# Altium PCB ArduinoProMini_PCB.PcbDoc
Units mm, origin at the board's own origin, x right, y up, seen from the top; angles counter-clockwise.
Board outline 60 x 30 mm, 2 copper layers (Top Layer, Bottom Layer), stack 1.672 mm thick; 26 components, 32 nets, 123 pads, 6 vias.
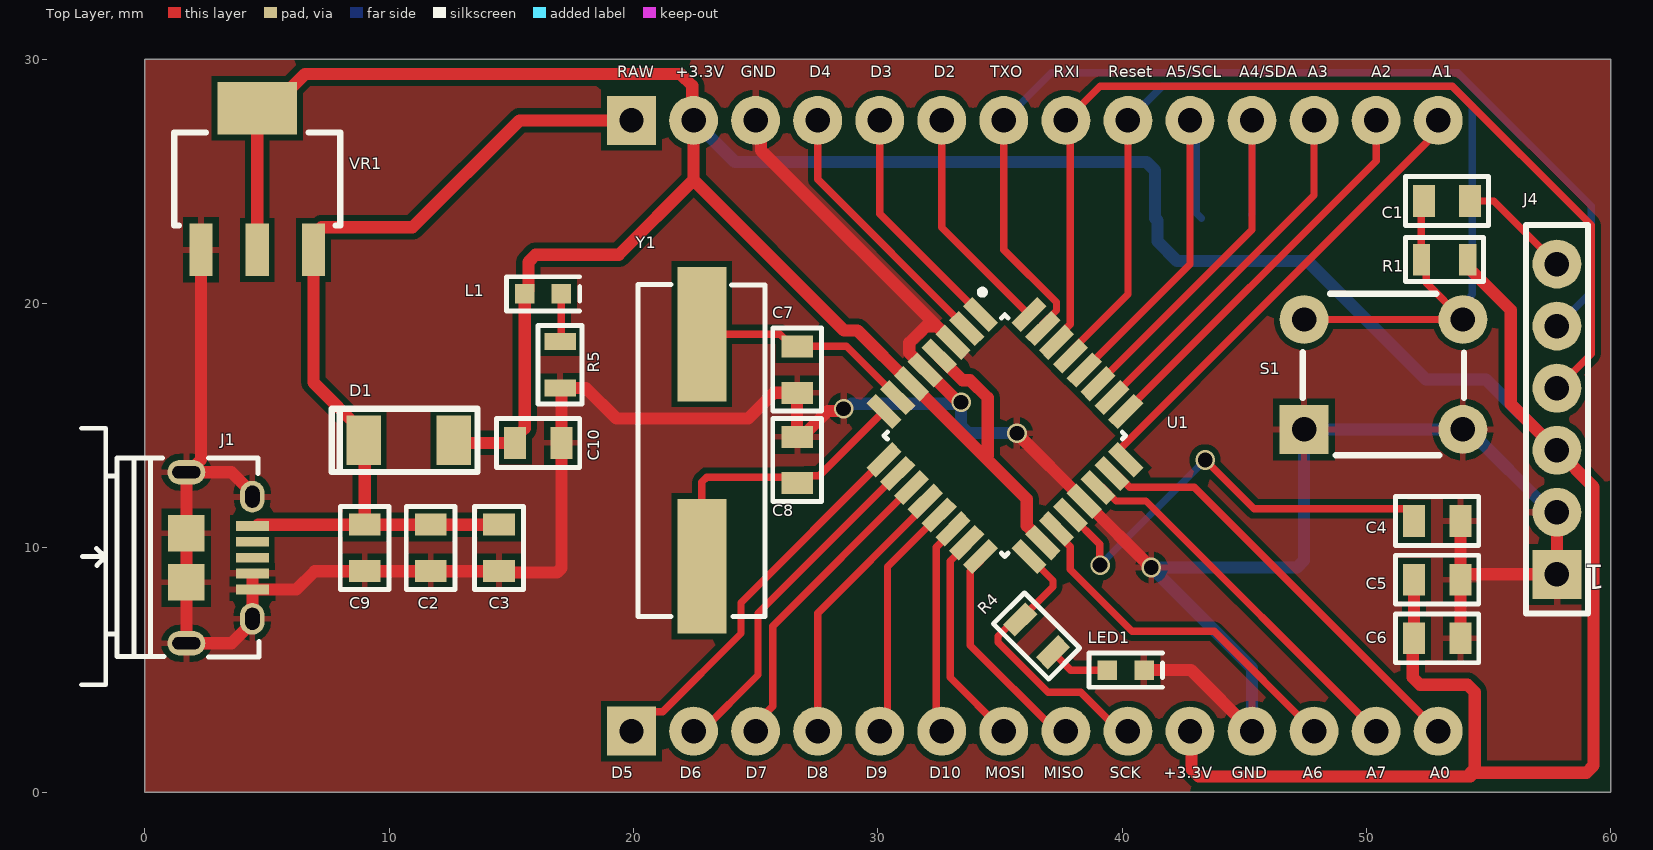
[diagram p0: Top Layer view]
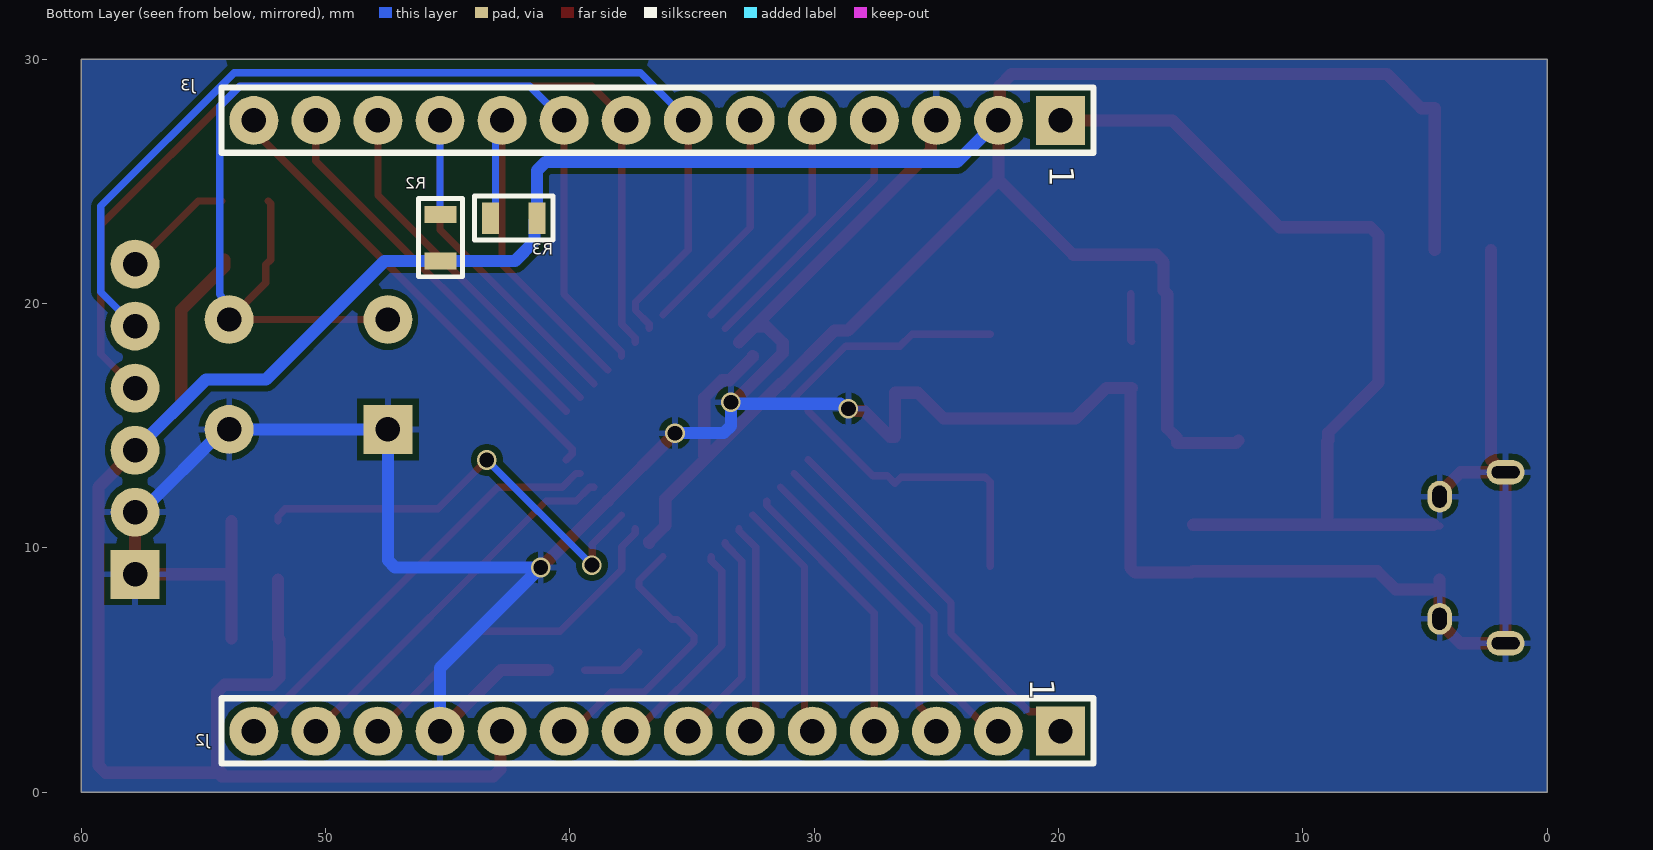
[diagram p1: Bottom Layer view, seen from below]
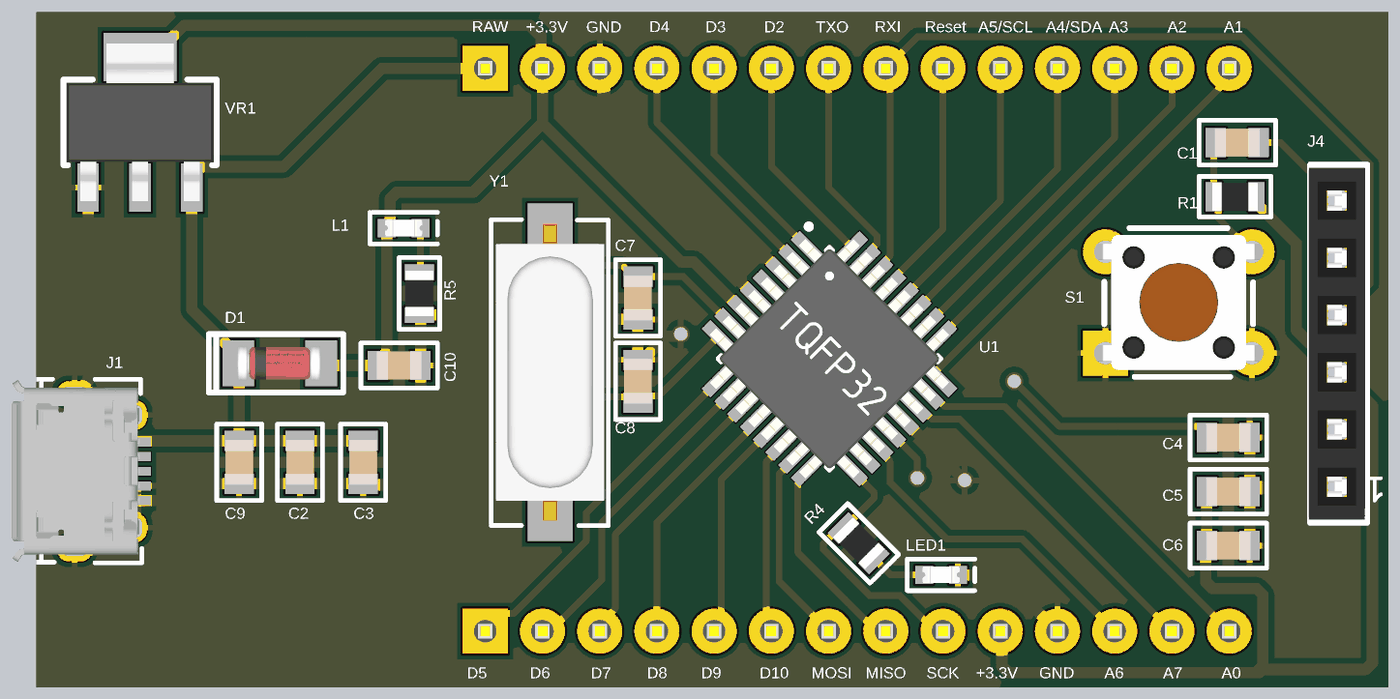
[diagram p2: 3D render of the assembled board from above, using the file's embedded part models]
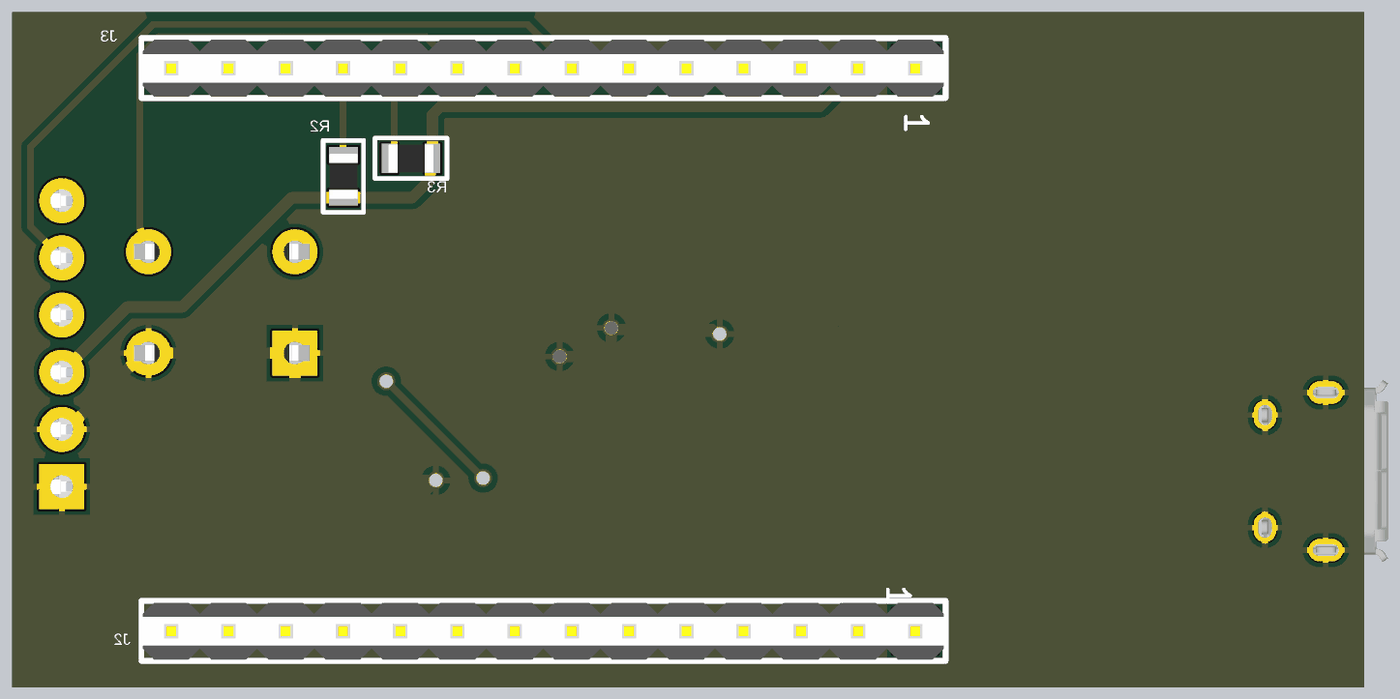
[diagram p3: 3D render of the assembled board from below, using the file's embedded part models]

## Layer stack, top to bottom
Top Solder: solder mask 0.0102, Solder Resist, Dk 3.5
Top Layer: signal copper 0.036
Dielectric 1: dielectric 1.6, FR-4, Dk 4.8
Bottom Layer: signal copper 0.036
Bottom Solder: solder mask 0.0102, Solder Resist, Dk 3.5

## Board outline
0,0 0,30 60,30 60,0

## Design rules (kind name [scope] priority, off if disabled: settings)
Clearance Clearance_Polygon [All] p1: gap=0.25 ignorepadtopadclearanceinfootprint=FALSE
Clearance [InPolygon] p2: gap=0.5 ignorepadtopadclearanceinfootprint=FALSE
HoleSize [All] p1: absolutevalues=TRUE maxlimit=5 minlimit=0.5 maxpercent=80.000 minpercent=20.000
HoleToHoleClearance [All] p1: gap=0.25 allowstackedmicrovias=TRUE
MinimumSolderMaskSliver [All] p1: minsoldermaskwidth=0.1
PolygonConnect [All] p1: connectstyle=Relief reliefconductorwidth=0.254 reliefentries=4 polygonreliefangle="90 Angle" airgapwidth=0.254
RoutingVias [All] p1: holewidth=0.6 width=0.8 viastyle="Through Hole" minholewidth=0.5 minwidth=0.7 maxholewidth=1 maxwidth=2
SilkToSilkClearance [All] p1: silktosilkclearance=0.1
SilkToSolderMaskClearance [IsPad] p1: minsilkscreentomaskgap=0.1 clearancetoexposedcopper=TRUE
SolderMaskExpansion [All] p1: expansion=0.102 istentingtop=FALSE
SupplyNets "Schematic Supply Nets_1" [InNet('GND')] p1: voltage=0.000
SupplyNets "Schematic Supply Nets" [InNet('+3.3V')] p2: voltage=0.000
Width [All] p1: maxlimit=1 minlimit=0.25 preferedwidth=0.3
25 further rules are at their usual default settings.

## Components (designator, comment, footprint, x,y, rotation, side; value= is the part's Value field where it differs from the comment)
C1 "100 nF 50V 0805" "C 0805" 53.3,24.2 r180 top value=100nF
C2 "100nF" "C 0805" 11.7,10 r90 top
C3 "100nF" "C 0805" 14.5,10 r90 top
C4 "100 nF 50V 0805" "C 0805" 52.9,11.1 r0 top value=100nF
C5 "100 nF 50V 0805" "C 0805" 52.9,8.7 r180 top value=100nF
C6 "100 nF 50V 0805" "C 0805" 52.9,6.3 r180 top value=100nF
C7 "18pF" "C 0805" 26.7,17.3 r90 top
C8 "18pF" "C 0805" 26.7,13.6 r270 top
C9 "10uF 16V" "C 0805" 9,10 r90 top value=10uF
C10 "10uF" "C 0805" 16.1,14.3 r180 top
D1 "1N4148" "DIode 1N4148" 10.8,14.4 r180 top
J1 "" Micro-USB-Type-B-FP 4.4,9.6 r270 top
J2 "Header 1*14 Male 2.54" "Header Male 1x14 2.54" 19.92,2.5 r270 bottom
J3 "Header 1*14 Male 2.54" "Header Male 1x14 2.54" 19.92,27.5 r270 bottom
J4 "Header 1*6 Female" "Header Female 1x6-254" 57.8,15.27 r180 top
L1 "LED Blue 0603" "LED 0603" 16.3,20.4 r0 top
LED1 "LED White 0603" "LED 0603" 40.15,5 r0 top
R1 "10K 16V" "R 0805" 53.2,21.8 r0 top value=10kR
R2 "10K 16V" "R 0805" 45.3,22.7 r90 bottom value=10kR
R3 "10K 16V" "R 0805" 42.3,23.5 r0 bottom value=10kR
R4 "330R 150V" "R 0805" 36.5,6.4 r135 top
R5 "330R 150V" "R 0805" 17,17.5 r90 top
S1 "1825910-6" SW-1825910-6 50.7,17.1 r90 top
U1 "ATMEGA328P-AUR" TQFP-32 35.2,14.6 r315 top
VR1 "LM1117-3.3" LM1117-SOT223 4.6,25.1 r90 top
Y1 "CSM 8Mhz" "Crystal CSM-7X" 22.8,14 r90 top

## Footprints (in the part's own frame and the unit in brackets; to place one, negate y for a bottom-side part, rotate by r counter-clockwise, add the part's x,y. Pads: shape width x height; smd on the part's side, far side on the other; paste and mask are expansions set on the pad)
"C 0805" [mm]
  rect 0.9x1.3 smd: 1(-0.95,0) 2(0.95,0)
  silkscreen extent -1.7,-1 1.7,1, body extent -1,-0.63 1,0.63, height 0.61
"Crystal CSM-7X" [mm]
  rect 5.5x2 smd: 1(-4.75,0) 2(4.75,0)
  silkscreen extent -6.81,-2.59 6.78,2.62, body extent -6.6,-2.4 6.6,2.4, height 4.31
"DIode 1N4148" [mm]
  rect 1.4x2.03 smd: A(-1.84,0) K(1.84,0)
  silkscreen extent -2.82,-1.3 3.15,1.3, body extent -1.81,-0.79 1.89,0.8, height 1.6
"Header Female 1x6-254" [mm]
  rect 2x2 hole 1: 1(0,6.35)
  round 2 hole 1: 2(0,3.81) 3(0,1.27) 4(0,-1.27) 5(0,-3.81) 6(0,-6.35)
  silkscreen extent -1.27,-7.95 1.27,7.95, body extent -1.17,-7.82 1.33,7.82, height 8.51
"Header Male 1x14 2.54" [mm]
  rect 2x2 hole 1: 1(0,0)
  round 2 hole 1: 2(0,-2.54) 3(0,-5.08) 4(0,-7.62) 5(0,-10.16) 6(0,-12.7) 7(0,-15.24) 8(0,-17.78) 9(0,-20.32) 10(0,-22.86) 11(0,-25.4) 12(0,-27.94) 13(0,-30.48) 14(0,-33.02)
  silkscreen extent -1.35,-34.34 1.32,1.35, body extent -1.27,-34.29 1.27,1.27, height 5.4
"LED 0603" [mm]
  rect 0.8x0.8 smd: 1(-0.75,0) 2(0.75,0)
  silkscreen extent -1.5,-0.7 1.5,0.7, body extent -0.82,-0.36 0.82,0.37, height 0.68
LM1117-SOT223 [mm]
  rect 2.15x0.95 smd: 1(-2.9,2.3) 2(-2.9,0) 3(-2.9,-2.3)
  rect 2.15x3.25 smd: 4(2.9,0)
  silkscreen extent -1.9,-3.4 1.9,3.4, body extent -3.5,-3.25 3.5,3.25, height 1.61
Micro-USB-Type-B-FP [mm]
  rect 0.4x1.35 smd mask+0.06: 1(-1.3,0) 2(-0.65,0) 3(0,0) 4(0.65,0) 5(1.3,0)
  oval 1.3x1 hole 0.6 slot 0.9 at 0 deg mask+0.06: 6(-2.5,0) 7(2.5,0)
  oval 1x1.55 hole 0.5 slot 1.15 at 90 deg mask+0.06: 8(-3.5,-2.7) 9(3.5,-2.7)
  rect 1.5x1.5 smd mask+0.06: 10(-1,-2.7) 11(1,-2.7)
  silkscreen extent -5.3,-7 5.2,0.28, body extent -4.04,-5.49 4.01,0.2, height 2.77
"R 0805" [mm]
  rect 0.7x1.3 smd: 1(-0.95,0) 2(0.95,0)
  silkscreen extent -1.6,-0.9 1.6,0.9, body extent -1,-0.63 1,0.63, height 0.61
SW-1825910-6 [mm]
  rect 2x2 hole 1: 1(-2.25,3.25)
  round 2 hole 1: 2(-2.25,-3.25) 3(2.25,-3.25) 4(2.25,3.25)
  silkscreen extent -3.3,-3.3 3.3,3.3, body extent -3,-3.9 3,3.9, height 5
TQFP-32 [mm]
  rect 1.5x0.55 smd mask+0.06: 1(-4.2,2.8) 2(-4.2,2) 3(-4.2,1.2) 4(-4.2,0.4) 5(-4.2,-0.4) 6(-4.2,-1.2) 7(-4.2,-2) 8(-4.2,-2.8) 17(4.2,-2.8) 18(4.2,-2) 19(4.2,-1.2) 20(4.2,-0.4) 21(4.2,0.4) 22(4.2,1.2) 23(4.2,2) 24(4.2,2.8)
  rect 0.55x1.5 smd mask+0.06: 9(-2.8,-4.2) 10(-2,-4.2) 11(-1.2,-4.2) 12(-0.4,-4.2) 13(0.4,-4.2) 14(1.2,-4.2) 15(2,-4.2) 16(2.8,-4.2) 25(2.8,4.2) 26(2,4.2) 27(1.2,4.2) 28(0.4,4.2) 29(-0.4,4.2) 30(-1.2,4.2) 31(-2,4.2) 32(-2.8,4.2)
  silkscreen extent -4.9,-3.5 3.5,3.6, body extent -4.51,-4.51 4.51,4.51, height 1.1

## Part data
C1 C2 C3 C4 C5 C6: library part C0805C104Z5VACTU, "Multilayer Ceramic Capacitor, 0.1 uF, 50 V, -20%, +80%, Y5V, 0805 [2012 Metric]", Case Code (Imperial)=0805, Case Code (Metric)=2012, Dielectric=Y5V, Dielectric Material=Ceramic, Manufacturer=KEMET, Max Operating Temperature=85°C, Min Operating Temperature=-30°C, Package Quantity=1, Supplier Part Number=399-C0805C104Z5VAC7800CT-ND, Tolerance=80%, Voltage=50V, Case/Package=0805, Category="Ceramic Capacitors", ComponentLink1Description=https://datasheet.ciiva.com/7842/1470417-7842543.pdf?src-supplier=Element14, ComponentLink1URL=https://datasheet.ciiva.com/7842/1470417-7842543.pdf?src-supplier=Element14, ComponentLink2Description=https://datasheet.ciiva.com/14608/70095383-14608251.pdf?src-supplier=Allied+Electronics, ComponentLink2URL=https://datasheet.ciiva.com/14608/70095383-14608251.pdf?src-supplier=Allied+Electronics, ComponentLink3Description=https://datasheet.ciiva.com/14597/70095383-14597846.pdf?src-supplier=Allied+Electronics, ComponentLink3URL=https://datasheet.ciiva.com/14597/70095383-14597846.pdf?src-supplier=Allied+Electronics, ComponentLink4Description=https://datasheet.ciiva.com/26847/getdatasheetpartid-321176-26847799.pdf?src-supplier=Verical, ComponentLink4URL=https://datasheet.ciiva.com/26847/getdatasheetpartid-321176-26847799.pdf?src-supplier=Verical, Construction=Flat, Depth=1.25mm, Dissipation Factor=5%, Height=0.9mm, Lead Free=5697LeadFree, Lead Pitch=0.75mm, Length=2mm, Manufacturer Part Number=C0805C104Z5VACTU, Material=4241ConductorMaterial, Mounting Technology="Surface Mount,PCB", Packaging="Tape and Reel", Pins=2NUMBER, Pricing="1=0.1, 10=0.043, 50=0.0248, 100=0.0193, 500=0.0145, 1000=0.01139 (USD)", Radiation Hardening=No, Reach SVHC Compliant=No, RoHS=Yes, RoHS Compliant=Yes, Series=C0805C, Stock=411669, Supplier=Digikey, Termination=SMD/SMT, Thickness=0.039inch, Voltage Rating=50V, Voltage Rating (DC)=50V, Width=0.049inch
C7 C8: library part CC0805JRNPO9BN180, "Multilayer Ceramic Capacitor, 18 pF, 50 V, ± 5%, C0G (NP0), 0805 [2012 Metric]", Manufacturer=Yageo, Supplier Part Number=7642911, Category="Ceramic Capacitors", ComponentLink1Description=https://datasheet.ciiva.com/26862/getdatasheetpartid-403658-26862933.pdf?src-supplier=Verical, ComponentLink1URL=https://datasheet.ciiva.com/26862/getdatasheetpartid-403658-26862933.pdf?src-supplier=Verical, ComponentLink2Description=https://datasheet.ciiva.com/144/mlccorderingcode-144754.pdf?src-supplier=Digikey, ComponentLink2URL=https://datasheet.ciiva.com/144/mlccorderingcode-144754.pdf?src-supplier=Digikey, ComponentLink3Description=https://datasheet.ciiva.com/144/mlccorderingcode-144755.pdf?src-supplier=Digikey, ComponentLink3URL=https://datasheet.ciiva.com/144/mlccorderingcode-144755.pdf?src-supplier=Digikey, ComponentLink4Description=https://datasheet.ciiva.com/144/mlccorderingcode-144756.pdf?src-supplier=Digikey, ComponentLink4URL=https://datasheet.ciiva.com/144/mlccorderingcode-144756.pdf?src-supplier=Digikey, ComponentLink5Description=https://datasheet.ciiva.com/11586/upy-gp-np0-16v-to-50v-8-11586203.pdf?src-supplier=Avnet, ComponentLink5URL=https://datasheet.ciiva.com/11586/upy-gp-np0-16v-to-50v-8-11586203.pdf?src-supplier=Avnet, Halogen Free=5694HalogenFree, Lead Free=5697LeadFree, Manufacturer Part Number=CC0805JRNPO9BN180, Pricing="4000=0.0082, 16000=0.0078, 60000=0.0075, 100000=0.0073, 200000=0.0069 (USD)", RoHS=Yes, Stock=232000, Supplier="Future Electronics"
C9 C10: library part C0805C106K4PACTU, "Multilayer Ceramic Capacitor, 10 uF, 16 V, ± 10%, X5R, 0805 [2012 Metric]", Case Code (Imperial)=0805, Case Code (Metric)=2012, Dielectric=X5R, Dielectric Material=Ceramic, Manufacturer=KEMET, Max Operating Temperature=85°C, Min Operating Temperature=-55°C, Package Quantity=1, Supplier Part Number=399-C0805C106K4PAC7800CT-ND, Tolerance=10%, Voltage=16V, Case/Package=0805, Category="Ceramic Capacitors", ComponentLink1Description=https://datasheet.ciiva.com/7842/1732713-7842196.pdf?src-supplier=Element14, ComponentLink1URL=https://datasheet.ciiva.com/7842/1732713-7842196.pdf?src-supplier=Element14, ComponentLink2Description=https://datasheet.ciiva.com/28682/1831760-28682305.pdf?src-supplier=Element14, ComponentLink2URL=https://datasheet.ciiva.com/28682/1831760-28682305.pdf?src-supplier=Element14, ComponentLink3Description=https://datasheet.ciiva.com/11787/0900766b8116eb59-11787314.pdf?src-supplier=Rs, ComponentLink3URL=https://datasheet.ciiva.com/11787/0900766b8116eb59-11787314.pdf?src-supplier=Rs, ComponentLink4Description=https://datasheet.ciiva.com/7842/1732713-7842197.pdf?src-supplier=Element14, ComponentLink4URL=https://datasheet.ciiva.com/7842/1732713-7842197.pdf?src-supplier=Element14, Construction=Flat, Depth=1.25mm, Dissipation Factor=5%, Height=1.25mm, Lead Free=5697LeadFree, Length=2mm, Manufacturer Part Number=C0805C106K4PACTU, Material=4241ConductorMaterial, Mounting Technology="Surface Mount", Packaging="Tape and Reel", Pins=2, Pricing="1=0.17, 10=0.109, 50=0.069, 100=0.0553, 500=0.03992, 1000=0.03531 (USD)", Radiation Hardening=No, Reach SVHC Compliant=No, RoHS=Yes, RoHS Compliant=Yes, Series=C, Stock=211297, Supplier=Digikey, Termination=SMD/SMT, Thickness=0.055inch, Voltage Rating=16V, Voltage Rating (DC)=16V, Width=0.049inch
D1: library part 1N4148UR-1, "Rectifier Diode Switching 75V 0.2A 5ns 2-Pin DO-213AA Bag", Forward Current=200mA, Manufacturer=Microsemi, Max Repetitive Reverse Voltage (Vrrm)=75V, Supplier Part Number=34AJ8178, Category=Uncategorized, ComponentLink1Description=https://datasheet.ciiva.com/3304/lds-0281-1-3304223.pdf?src-supplier=Avnet, ComponentLink1URL=https://datasheet.ciiva.com/3304/lds-0281-1-3304223.pdf?src-supplier=Avnet, Lead Free="Lead Free", Manufacturer Part Number=1N4148UR-1, Reverse Recovery Time-Max=5ns, RoHS=No, Supplier=Newark
J1: library part Micro-USB-Type-B-SCH, "CONN USB MICRO B RECPT SMT R/A", Color=Black, Current Rating=1.8A, Flammability Rating="UL94 V-0", Insulation Resistance=1GR, Manufacturer="Amphenol ICC / FCI", Manufacturer Part Number=10118194-0001LF, Max Operating Temperature=85°C, Max Voltage Rating (AC)=100V, Min Operating Temperature=-55°C, Package Quantity=9600, Supplier Part Number=1370829, Category=LDO, Connector Type=USB,Receptacle, Contact Material="Copper Alloy", Contact Plating=Gold, Depth=5mm, Features=Shielded, Gender=Receptacle, Housing Material=Polymer, Length=8.05mm, Mounting Technology="Surface Mount,Horizontal", Number of Contacts=5, Number of Ports=1, Orientation="Right Angle", Packaging="Tape and Reel", Pins=5, Pricing="1200=0.225, 2400=0.219 (EUR)", RoHS=No, Series=-, Stock=4420, Supplier=Rs, Termination=Solder
J2 J3: library part PH1-14-UA, "Conn Unshrouded Header HDR 14 POS 2.54mm Solder ST Thru-Hole Bag", Flammability Rating="UL94 V-0", Insulation Color=Black, Manufacturer="Adam Equipment", Max Operating Temperature=105°C, Min Operating Temperature=-40°C, Supplier Part Number=9109416, Voltage Rating (AC)=250V, Category=Connectors, ComponentLink1Description=https://datasheet.ciiva.com/16480/catpg250-254-16480235.pdf?src-supplier=Future+Electronics, ComponentLink1URL=https://datasheet.ciiva.com/16480/catpg250-254-16480235.pdf?src-supplier=Future+Electronics, Connector Type=Header, Contact Finish - Mating=GOLD, Contact Material=Brass, Contact Shape=Square, Contact Type="Male Pin", Fastening Type=Pull, Insulation Material=PBT, Lead Free="Lead Free", Manufacturer Part Number=PH1-14-UA, Mounting Technology="Through Hole", Number of Positions=14, Number of Rows=1, Packaging=Bulk, Pricing="1000=0.0993, 3000=0.0952, 5000=0.0934, 15000=0.0895, 25000=0.0862 (USD)", RoHS=Yes, Series=PH1, Stock=12000, Supplier="Future Electronics", Termination=Solder
J4: library part M20-7820646, "2.54mm (0.1\") Pitch SIL Vertical PC Tail Socket Assembly, tin, 6 contacts", Case/Package=SIL, Flammability Rating="UL94 V-0", Insulation Color=Black, Manufacturer=Harwin, Max Operating Temperature=105°C, Min Operating Temperature=-40°C, Package Quantity=38, Supplier Part Number=1613515, Voltage Rating=1kV, Category="Headers and Wire Housings", ComponentLink1Description=https://cdn.harwin.com/pdfs/Harwin_PC_Connectors_M20.pdf?src-supplier=Rs, ComponentLink1URL=https://cdn.harwin.com/pdfs/Harwin_PC_Connectors_M20.pdf?src-supplier=Rs, ComponentLink2Description=http://www.harwin.com/include/downloads/pdfs/2010PAGE120.PDF?src-supplier=Avnet, ComponentLink2URL=http://www.harwin.com/include/downloads/pdfs/2010PAGE120.PDF?src-supplier=Avnet, ComponentLink3Description=https://cdn.harwin.com/pdfs/M20-782.pdf?src-supplier=Digikey, ComponentLink3URL=https://cdn.harwin.com/pdfs/M20-782.pdf?src-supplier=Digikey, ComponentLink4Description=https://cdn.harwin.com/pdfs/Harwin_PC_Connectors_M20.pdf?src-supplier=Mouser, ComponentLink4URL=https://cdn.harwin.com/pdfs/Harwin_PC_Connectors_M20.pdf?src-supplier=Mouser, ComponentLink5Description=https://cdn.harwin.com/pdfs/Harwin_PC_Connectors_M20.pdf?src-supplier=TTI, ComponentLink5URL=https://cdn.harwin.com/pdfs/Harwin_PC_Connectors_M20.pdf?src-supplier=TTI, Connector Type=Receptacle, Contact Finish - Mating=TIN, Contact Gender=Female, Contact Material=Bronze, Contact Plating=Tin, Contact Shape=Square, Contact Type="Female Socket", Fastening Type=Pull, Insulation Material=Nylon, Manufacturer Part Number=M20-7820646, Mated Stacking Heights=12.63mm, Mounting Technology="Through Hole", Number of Contacts=6, Number of Positions=6, Number of Rows=1, Packaging=Rail/Tube, Pitch=2.54mm, Pricing="36=0.938, 180=0.875, 360=0.781, 720=0.704 (EUR)", Radiation Hardening=No, RoHS=Yes, RoHS Compliant=Yes, Series=M20, Stock=396, Supplier=Rs, Termination=Solder
L1: library part LTST-C194TBKT, "LED BLUE CLEAR 0603 SMD", Manufacturer="Vishay Lite-On", Supplier Part Number=1278417, Category=LEDs, ComponentLink1Description=https://datasheet.ciiva.com/2115/ltst-c194tbkt-2115056.pdf?src-supplier=Digikey, ComponentLink1URL=https://datasheet.ciiva.com/2115/ltst-c194tbkt-2115056.pdf?src-supplier=Digikey, ComponentLink2Description=https://datasheet.ciiva.com/4689/lite-on-ltst-c194tbkt-187209-4689177.pdf?src-supplier=Mouser, ComponentLink2URL=https://datasheet.ciiva.com/4689/lite-on-ltst-c194tbkt-187209-4689177.pdf?src-supplier=Mouser, ComponentLink3Description=https://datasheet.ciiva.com/2115/s-110-ltst-c194tbkt-2115057.pdf?src-supplier=Digikey, ComponentLink3URL=https://datasheet.ciiva.com/2115/s-110-ltst-c194tbkt-2115057.pdf?src-supplier=Digikey, Manufacturer Part Number=LTST-C194TBKT, Pricing="50=0.208, 750=0.092, 1500=0.069, 3000=0.066, 6000=0.058 (EUR)", RoHS=Yes, Stock=8750, Supplier=Rs
LED1: library part IN-S63AT5UW, "SMD LED - Mono Color Top View, 0603 0.40mm LED PCB Type, White, High Brightness, Clear Lens, Angle 120", Case Code (Imperial)=0603, Case Code (Metric)=1608, Color=White, Forward Current=5mA, Forward Voltage=3V, Lens Color=Clear, Manufacturer=Inolux, Max Operating Temperature=85°C, Min Operating Temperature=-40°C, Power Dissipation=75mW, Reverse Voltage=5V, Supplier Part Number=743-IN-S63AT5UW, Case/Package=0603, Category=LEDs, ComponentLink1Description=http://www.inolux-corp.com/datasheet/SMDLED/Mono%20Color%20Top%20View/IN-S63AT%20Series_V1.1.pdf?src-supplier=Digikey, ComponentLink1URL=http://www.inolux-corp.com/datasheet/SMDLED/Mono%20Color%20Top%20View/IN-S63AT%20Series_V1.1.pdf?src-supplier=Digikey, Height=0.4mm, Length=1.6mm, Lens Size=0.8mm, Lens Style=Flat, Lens Transparency=Clear, Luminous Intensity=900mcd, Manufacturer Part Number=IN-S63AT5UW, Mounting Technology="Surface Mount", Packaging="Tape and Reel", Pricing="1=0.33, 10=0.177, 50=0.177, 100=0.076, 1000=0.059, 10000=0.044 (USD)", RoHS=Yes, Stock=170396, Supplier=Mouser, Test Current=5mA, Viewing Angle=120°, Width=0.8mm
R1 R2 R3: library part RC0805FR-0710KL, "SMD Chip Resistor, 10 kOhm, ± 1%, 125 mW, 0805 [2012 Metric], Thick Film, General Purpose", Case Code (Imperial)=0805, Case Code (Metric)=2012, Manufacturer=Yageo, Max Operating Temperature=155°C, Max Power Dissipation=125mW, Min Operating Temperature=-55°C, Package Quantity=1, Resistance Tolerance=1%, Resistor Type="Thick Film", Supplier Part Number=3310877, Temperature Coefficient=100ppm/°C, Voltage Rating=150V, Case/Package=0805, Category="Chip SMD Resistors", ComponentLink1Description=https://datasheet.ciiva.com/2456/pyu-r-int-thick-7-2456973.pdf?src-supplier=Digikey, ComponentLink1URL=https://datasheet.ciiva.com/2456/pyu-r-int-thick-7-2456973.pdf?src-supplier=Digikey, ComponentLink2Description=https://datasheet.ciiva.com/2456/pyu-r-int-thick-7-2456974.pdf?src-supplier=Digikey, ComponentLink2URL=https://datasheet.ciiva.com/2456/pyu-r-int-thick-7-2456974.pdf?src-supplier=Digikey, ComponentLink3Description=https://datasheet.ciiva.com/12669/rc0805-12669688.pdf?src-supplier=Mouser, ComponentLink3URL=https://datasheet.ciiva.com/12669/rc0805-12669688.pdf?src-supplier=Mouser, ComponentLink4Description=https://datasheet.ciiva.com/16747/rc0805-16747087.pdf?src-supplier=Future+Electronics, ComponentLink4URL=https://datasheet.ciiva.com/16747/rc0805-16747087.pdf?src-supplier=Future+Electronics, Construction=Rectangular, Depth=1.25mm, Features="Moisture Resistant", Height=0.024inch, Lead Free="Lead Free", Length=0.079inch, Manufacturer Part Number=RC0805FR-0710KL, Military Standard=Not, Number of Terminations=2, Packaging="Tape and Reel", Power Rating=125mW, Pricing="5000=0.004, 25000=0.0038, 150000=0.0035, 500000=0.0034, 1500000=0.0031 (USD)", Reach SVHC Compliant=Unknown, RoHS=Yes, RoHS Compliant=Yes, Series=RC, Stock=1020000, Supplier="Future Electronics", Technology="THICK FILM", Termination=SMD/SMT, Tolerance=1%, Voltage Rating (AC)=150V, Width=0.049inch
R4 R5: library part RC0805JR-07330RL, "SMD Chip Resistor, 330 Ohm, ± 5%, 125 mW, 0805 [2012 Metric], Thick Film, General Purpose", Manufacturer=Yageo, Supplier Part Number=7136500, Voltage Rating (AC)=150V, Category="Chip SMD Resistors", ComponentLink1Description=https://datasheet.ciiva.com/12555/rc0805-257173-12555078.pdf?src-supplier=Mouser, ComponentLink1URL=https://datasheet.ciiva.com/12555/rc0805-257173-12555078.pdf?src-supplier=Mouser, ComponentLink2Description=https://datasheet.ciiva.com/46395/444164-46395119.pdf?src-supplier=Element14, ComponentLink2URL=https://datasheet.ciiva.com/46395/444164-46395119.pdf?src-supplier=Element14, ComponentLink3Description=https://datasheet.ciiva.com/7941/442941-7941941.pdf?src-supplier=Element14, ComponentLink3URL=https://datasheet.ciiva.com/7941/442941-7941941.pdf?src-supplier=Element14, ComponentLink4Description=https://datasheet.ciiva.com/7941/442941-7941942.pdf?src-supplier=Element14, ComponentLink4URL=https://datasheet.ciiva.com/7941/442941-7941942.pdf?src-supplier=Element14, ComponentLink5Description=https://datasheet.ciiva.com/17008/rc0805-17008395.pdf?src-supplier=Future+Electronics, ComponentLink5URL=https://datasheet.ciiva.com/17008/rc0805-17008395.pdf?src-supplier=Future+Electronics, Manufacturer Part Number=RC0805JR-07330RL, Pricing="5000=0.0037, 25000=0.0034, 125000=0.0032, 250000=0.0031, 750000=0.0029 (USD)", RoHS=Yes, Stock=415000, Supplier="Future Electronics"
S1: "Alcoswitch, Switch, Pushbutton, Tactile, SPST, 50mA, Thru Hole, 6mm", Color=46Colour, Contact Current Rating=50mA, Insulation Resistance=100MR, Manufacturer="TE Connectivity Alcoswitch", Max Operating Temperature=85°C, Max Voltage Rating (DC)=24V, Min Operating Temperature=-35°C, Operating Force=160gf, Supplier Part Number=9026957, Actuator Length=0.055inch, Actuator Material=PBT, Actuator Type=Standard, Category="Pushbutton Switches", ComponentLink1Description=https://datasheet.ciiva.com/30199/1825910-6rqpn1825910-6-30199520.pdf?src-supplier=Onlinecomponents.com, ComponentLink1URL=https://datasheet.ciiva.com/30199/1825910-6rqpn1825910-6-30199520.pdf?src-supplier=Onlinecomponents.com, ComponentLink2Description=https://datasheet.ciiva.com/15184/getdatasheetpartid-395915-15184509.pdf?src-supplier=Verical, ComponentLink2URL=https://datasheet.ciiva.com/15184/getdatasheetpartid-395915-15184509.pdf?src-supplier=Verical, Contact Material="Copper Alloy", Contact Plating=Silver, Current Rating=50mA, ELV=Compliant, Illumination Type=Non-Illuminated,Illuminated, Lead Free="Lead Free", Length=5.99mm, Manufacturer Part Number=1825910-6, Material=4261ConductorMaterial, Max Current Rating=50mA, Mechanical Life=100000Cycles, Mounting Technology="Through Hole", Number of Positions=2NUMBER, Packaging="Loose Piece", Pricing="1=0.0732, 750=0.0703, 2500=0.0673, 7500=0.0647, 25000=0.0596 (USD)", Reach SVHC Compliant=Unknown, RoHS=Yes, RoHS Compliant=Yes, Series=FSMJ, Stock=109532, Supplier="Future Electronics", Switch Function=Off-Mom, Switch Travel=0.25mm, Termination="PC Pins", Throw Configuration=SPST, Type=Switch, Width=6mm
U1: "1.8V~5.5V AVR 2MHz 23 TQFP-32 Microcontroller Units (MCUs/MPUs/SOCs) ROHS", Case/Package=TQFP, Clock Frequency=20MHz, Manufacturer=Microchip, Max Operating Temperature=85°C, Max Supply Voltage=5.5V, Min Operating Temperature=-40°C, Min Supply Voltage=1.8V, Supplier Part Number=1773264P, Category=Microcontrollers, ComponentLink1Description=http://www.farnell.com/datasheets/2047852.pdf?src-supplier=Farnell, ComponentLink1URL=http://www.farnell.com/datasheets/2047852.pdf?src-supplier=Farnell, ComponentLink2Description=http://components.arrow.com/part/dataview/48719204S8832641N3744?src-supplier=Arrow+Electronics, ComponentLink2URL=http://components.arrow.com/part/dataview/48719204S8832641N3744?src-supplier=Arrow+Electronics, ComponentLink3Description=http://www.produktinfo.conrad.com/datenblaetter/1200000-1299999/001267077-da-01-en-IC_MCU_8BIT_3_ATMEGA328P_AUR_TQFP_32_ATM.pdf?src-supplier=Conrad, ComponentLink3URL=http://www.produktinfo.conrad.com/datenblaetter/1200000-1299999/001267077-da-01-en-IC_MCU_8BIT_3_ATMEGA328P_AUR_TQFP_32_ATM.pdf?src-supplier=Conrad, ComponentLink4Description=https://datasheet.octopart.com/ATMEGA328P-AUR-Microchip-datasheet-14421303.pdf?src-supplier=Newark, ComponentLink4URL=https://datasheet.octopart.com/ATMEGA328P-AUR-Microchip-datasheet-14421303.pdf?src-supplier=Newark, ComponentLink5Description=http://www.farnell.com/datasheets/2047852.pdf?src-supplier=Element14, ComponentLink5URL=http://www.farnell.com/datasheets/2047852.pdf?src-supplier=Element14, ComponentLink6Description=https://datasheet.octopart.com/ATMEGA328P-AUR-Microchip-datasheet-101746195.pdf?src-supplier=Future+Electronics, ComponentLink6URL=https://datasheet.octopart.com/ATMEGA328P-AUR-Microchip-datasheet-101746195.pdf?src-supplier=Future+Electronics, ComponentLink7Description=http://www.farnell.com/datasheets/1693866.pdf?src-supplier=Newark, ComponentLink7URL=http://www.farnell.com/datasheets/1693866.pdf?src-supplier=Newark, ComponentLink8Description=https://datasheet.octopart.com/ATMEGA328P-AUR-Microchip-datasheet-133520744.pdf?src-supplier=LKR, ComponentLink8URL=https://datasheet.octopart.com/ATMEGA328P-AUR-Microchip-datasheet-133520744.pdf?src-supplier=LKR, ComponentLink9Description=https://datasheet.octopart.com/ATMEGA328P-AUR-Microchip-datasheet-154741723.pdf?src-supplier=Electro+Sonic, ComponentLink9URL=https://datasheet.octopart.com/ATMEGA328P-AUR-Microchip-datasheet-154741723.pdf?src-supplier=Electro+Sonic, Contact Plating=154ConductorMaterial, Core Architecture=PIC, Data Bus Width=8b, Height=1.2mm, Interface=I2C,SPI,UART,USART, Lead Free=5697LeadFree, Manufacturer Part Number=ATMEGA328P-AUR, Memory Format=FLASH, Memory Size=32KB, Mounting Technology="Surface Mount", Number of ADC Channels=8NUMBER, Number of I2C Channels=1NUMBER, Number of I/Os=23, Number of Programmable I/O=23NUMBER, Number of PWM Channels=6NUMBER, Number of SPI Channels=2NUMBER, Number of Timers/Counters=3NUMBER, Number of UART Channels=1NUMBER, Oscillator Type=Internal, Packaging="Cut Tape", Peripherals="Brown-out Detect/Reset,POR,PWM,WDT", Pins=32, Pricing="25=2.466, 100=2.376 (EUR)", RAM Size=2KB, Reach SVHC Compliant=4186SVHC, RoHS=Yes, RoHS Compliant=Yes, Series="PIC® 18F", Stock=1655, Supplier=Rs, Watchdog Timer=5512WatchdogTimer
VR1: library part LM1117MPX-3.3/NOPB, "Positive Voltage Regulator, LDO, 3.3V, 0.8A, 1%, 1.2V dropout, 0÷125°C; LM1117MPX-3.3/NOPB", Manufacturer="Texas Instruments", Min Current Limit=800mA, Supplier Part Number=926-LM1117MPX3.3NOPB, Category="Voltage Regulators - Linear", ComponentLink1Description=https://datasheet.ciiva.com/49027/1882372-49027926.pdf?src-supplier=Element14, ComponentLink1URL=https://datasheet.ciiva.com/49027/1882372-49027926.pdf?src-supplier=Element14, Lead Free=5697LeadFree, Manufacturer Part Number=LM1117MPX-3.3/NOPB, Number of Channels=1NUMBER, Pricing="1=1.09, 10=0.882, 50=0.882, 100=0.683, 1000=0.501, 10000=0.432 (USD)", Radiation Hardening=5898YesNo, RoHS=Yes, Stock=56928, Supplier=Mouser, Thickness=1.6mm
Y1: library part ECS-80-18-5PX-TR, "Crystal 8MHz ±30ppm (Tol) ±50ppm (Stability) 18pF FUND 60Ohm 2-Pin HC-49/USX SMD T/R", Manufacturer="ECS International", Category=Crystals, ComponentLink1Description=https://datasheet.ciiva.com/852/csm-7x-852380.pdf?src-supplier=Digikey, ComponentLink1URL=https://datasheet.ciiva.com/852/csm-7x-852380.pdf?src-supplier=Digikey, ComponentLink2Description=https://datasheet.ciiva.com/852/csm-7x-852381.pdf?src-supplier=Digikey, ComponentLink2URL=https://datasheet.ciiva.com/852/csm-7x-852381.pdf?src-supplier=Digikey, ComponentLink3Description=https://datasheet.ciiva.com/852/csm-7x-852382.pdf?src-supplier=Digikey, ComponentLink3URL=https://datasheet.ciiva.com/852/csm-7x-852382.pdf?src-supplier=Digikey, Manufacturer Part Number=ECS-80-18-5PX-TR, Pricing="1000=0.2205, 2000=0.2205, 4000=0.2205, 6000=0.1911, 8000=0.1911, 250000=0.1617, 500000=0.1617, 1000000=0.1617 (USD)", RoHS=Yes, Stock=32000, Supplier=Avnet, Supplier Part Number=ECS-80-18-5PX-TR

## Via types
v1: diameter 0.8, hole 0.6, Top Layer to Bottom Layer, tented both sides, 6 vias

## Nets (pads, with @x,y where several pads share a name; then routed paths per layer and width w, separated by ;. In a path a pad name is that pad's centre, name@x,y a point inside that pad or via, vN(x,y) a via of type N, cw(c..) or ccw(c..) an arc to the next point about the centre after c; other vN are vias at no path point)
+3.3V: C5.2 C6.2 C10.2 D1.A J2.10 J3.2 J4.3 L1.1 R1.2 R2.1 R3.1 U1.4 U1.6 U1.18 VR1.2 VR1.4 | length 166.6
  Top Layer w0.5: VR1.2 VR1.4 5.15,28 6.55,29.4 21.92,29.4 22.403,28.918 22.403,27.583 J3.2@22.46,27.526 ; D1.A 12.74,14.3 C10.2 15.15,14.5 15.55,14.9 L1.1 15.7,20.55 15.7,21.707 15.993,22 19.4,22 22.46,25.06 ; J3.2 22.46,25.06 ; U1.4 32.513,17.817 33.463,16.867 33.781,16.867 34.5,16.149 34.5,13.782 ; U1.18 36.756,10.251 36.097,10.91 36.097,12.006 34.482,13.621 U1.6 31.346,16.721 29.168,18.9 28.62,18.9 22.46,25.06 ; J2.10 42.848,2.432 42.848,1.093 ; 42.848,0.943 43.141,0.65 54.261,0.65 ; C5.2 C6.2 51.9,6.25 51.9,4.693 52.193,4.4 54.144,4.4 54.44,4.104 54.44,0.979 54.261,0.8 54.44,0.8 59.007,0.8 59.3,1.093 59.3,12.5 J4.3 55.912,15.888 55.912,19.738 54.15,21.5 R1.2
  Bottom Layer w0.5: J3.2 24.16,25.8 41,25.8 41.35,25.45 R3.1 41.45,23.4 41.45,22.55 42.25,21.75 R2.1 47.595,21.75 52.445,16.9 54.9,16.9 J4.3 ; J2.10@42.715,2.565 J2.10
A0: J2.14 U1.23 | length 17.7
  Top Layer w0.3: U1.23 39.761,13.044 40.32,12.485 42.955,12.485 J2.14
A1: J3.14 U1.24 | length 19.4
  Top Layer w0.3: U1.24 39.902,13.858 39.902,14.034 52.94,27.072 J3.14
A2: J3.13 U1.25 | length 16.2
  Top Layer w0.3: U1.25 50.4,25.84 J3.13
A3: J3.12 U1.26 | length 14.8
  Top Layer w0.3: U1.26 47.86,24.432 J3.12
A4/SDA: J3.11 R2.2 U1.27 | length 17.2
  Top Layer w0.3: U1.27 45.32,23.023 J3.11
  Bottom Layer w0.3: R2.2 45.32,23.67 J3.11
A5/SCL: J3.10 R3.2 U1.28 | length 16.6
  Top Layer w0.3: U1.28 42.78,21.614 J3.10
  Bottom Layer w0.3: J3.10@42.78,27.109 J3.10 43.05,27.23 43.05,23.7 R3.2
A6: J2.12 U1.19 | length 14.6
  Top Layer w0.3: U1.19 37.321,10.605 37.88,10.046 37.88,9.12 40.409,6.591 43.769,6.591 J2.12
A7: J2.13 U1.22 | length 15.5
  Top Layer w0.3: U1.22 39.195,12.479 39.754,11.92 40.98,11.92 J2.13
D2: J3.6 U1.32 | length 9.4
  Top Layer w0.3: J3.6 32.62,23.12 U1.32
D3: J3.5 U1.1 | length 9.7
  Top Layer w0.3: J3.5 30.08,23.68 U1.1
D4: J3.4 U1.2 | length 11
  Top Layer w0.3: J3.4 27.54,25.088 U1.2
D5: J2.1 U1.9 | length 15.7
  Top Layer w0.3: J2.1 20.715,3.295 21.195,3.295 24.4,6.5 24.4,7.76 U1.9
D6: J2.2 U1.10 | length 14.2
  Top Layer w0.3: J2.2 22.8,2.5 25.1,4.8 25.1,7.328 U1.10
D7: J2.3 U1.11 | length 12.6
  Top Layer w0.3: J2.3 25,2.826 25.7,3.526 25.7,6.797 U1.11
D8: J2.4 U1.12 | length 11.2
  Top Layer w0.3: J2.4 27.54,7.329 31.947,11.736 U1.12
D9: J2.5 U1.13 | length 9.9
  Top Layer w0.3: J2.5 30.4,2.82 30.4,9.234 U1.13
D10: J2.6 U1.14 | length 8.7
  Top Layer w0.3: J2.6 32.4,2.72 32.4,10.031 33.079,10.71 U1.14
DTR: C1.1 J4.6 | length 4.6
  Top Layer w0.3: C1.1 55.22,24.2 J4.6 J4.6@57.78,21.6
GND: C2.1 C3.1 C4.2 C5.1 C6.1 C7.1 C8.1 C9.1 C10.1 J1.4 J1.5 J1.6 J1.7 J1.8 J1.9 J1.10 J1.11 J2.11 J3.3 J4.1 J4.2 LED1.2 R5.1 S1.1 S1.2 U1.3 U1.5 U1.21 VR1.1 | length 141.7
  Top Layer w0.5: VR1.1 2.3,13.614 J1.8@1.786,13.1 ; 4.4,8.7 J1.5 ; J1.6 4.4,12.25 3.55,13.1 J1.8@1.786,13.1 ; J3.3 25.224,27.276 25.224,26.273 U1.3 ; v1(28.6,15.7) 28.504,15.604 27.954,15.604 26.9,14.55 C8.1 C7.1 25.75,16.35 24.7,15.3 19.3,15.3 18.05,16.55 R5.1 17.05,16.5 C10.1 17.05,9.176 16.874,9 14.55,9 C3.1 C2.1 6.95,9.05 6.2,8.3 J1.5 ; 32.384,19.077 31.97,19.077 31.288,18.396 31.288,17.981 32.642,16.628 33.153,16.117 33.177,16.117 33.327,15.967 v1(33.409,15.967) ; v1(35.7,14.7) 35.7,14.683 38.453,11.93 U1.21 38.47,11.913 41.183,9.2 v1(41.2,9.2) ; LED1.2 42.82,5 J2.11 J2.11@45.41,2.59 ; C6.1 C5.1 ; C4.2 C5.1 ; J4.2 J4.1 54.07,8.92 C5.1 ; J1.8@1.786,13.1 J1.8 J1.10 J1.11 J1.9 3.55,6.1 4.4,6.95 J1.7 J1.5
  Bottom Layer w0.5: v1(28.6,15.7) 28.735,15.7 28.935,15.9 33.341,15.9 33.391,15.949 v1(33.409,15.967) 33.409,14.993 33.701,14.7 v1(35.7,14.7) ; J2.11 45.32,5.08 v1(41.2,9.2) 47.157,9.2 47.45,9.493 S1.1 S1.2 54.18,14.85 57.57,11.46 J4.2
MISO: J2.8 U1.16 | length 9.2
  Top Layer w0.3: U1.16 34.21,9.473 33.793,9.056 33.793,6.007 37.3,2.5 J2.8
MOSI: J2.7 U1.15 | length 8.9
  Top Layer w0.3: U1.15 33.644,10.147 32.963,9.465 32.963,4.697 J2.7
NetC4_1: C4.1 U1.20 | length 18.3
  Top Layer w0.3: U1.20 39.084,10.15 39.084,9.316 v1(39.1,9.3) ; v1(43.4,13.6) 45.4,11.6 51.65,11.6 51.95,11.3 C4.1
  Bottom Layer w0.3: v1(39.1,9.3) v1(43.4,13.6)
NetC7_2: C7.2 U1.7 Y1.2 | length 9.1
  Top Layer w0.3: Y1.2 26,18.75 26.5,18.25 C7.2 28.722,18.25 U1.7
NetC8_2: C8.2 U1.8 Y1.1 | length 12.3
  Top Layer w0.3: Y1.1 22.8,12.7 23,12.9 26.45,12.9 C8.2 27,12.95 27.61,12.95 U1.8
NetL1_2: L1.2 R5.2 | length 2
  Top Layer w0.3: R5.2 17.05,18.5 L1.2
NetLED1_1: LED1.1 R4.1 | length 2.5
  Top Layer w0.3: R4.1 37.9,5 LED1.1
RAW: C2.2 C3.2 C9.2 D1.K J1.1 J3.1 VR1.3 | length 38
  Top Layer w0.3: J1.1 J1.1@4.875,10.9
  Top Layer w0.5: J1.1@4.637,10.95 C9.2 ; C3.2 C2.2 C9.2 ; J3.1 15.335,27.5 10.96,23.125 7.225,23.125 6.9,22.8 VR1.3 6.9,16.775 8.96,14.715 D1.K 9,14.36 C9.2
Reset: C1.2 J3.9 R1.1 S1.3 S1.4 U1.29 | length 46.6
  Top Layer w0.3: U1.29 37.887,18.029 40.24,20.382 J3.9 ; S1.4 S1.3 52.45,20.85 52.45,21.6 R1.1 52.25,24.1 C1.2
  Bottom Layer w0.3: J3.9 41.64,28.9 53.52,28.9 54.34,28.08 54.34,20.376 54.275,20.311 54.275,19.675 S1.3
RXI: J3.8 J4.4 U1.30 | length 41.1
  Top Layer w0.3: U1.30 37.321,18.595 37.88,19.154 37.88,27.32 J3.8 39.1,28.9 53.52,28.9 59.2,23.22 59.2,17.94 J4.4
SCK: J2.9 R4.2 U1.17 | length 11.8
  Top Layer w0.3: U1.17 36.276,9.564 37.174,8.666 37.174,8.418 R4.2 35.612,7.072 34.924,6.384 34.924,6.135 36.972,4.088 38.312,4.088 39.9,2.5 J2.9
TXO: J3.7 J4.5 U1.31 | length 42.2
  Top Layer w0.3: J3.7 35.16,22.206 37.315,20.051 37.315,19.72 36.756,19.161 U1.31
  Bottom Layer w0.3: J3.7 37.11,29.45 53.748,29.45 59.2,23.998 59.2,20.48 J4.5
pads on no net: J1.2 J1.3

## Polygon pours and split planes (outlines as drawn)
GND on Top Layer "GND_L01_P000" (solid, remove dead copper, pour order 0): 0,0 0,30 60,30 60,0
GND on Bottom Layer "GND_L02_P001" (solid, remove dead copper, pour order 1): 0,0 0,30 60,30 60,0

## Silkscreen, mask and mechanical layers (free items; w line width, h text height)
Top Overlay:
  text "RAW" at 19.326,29.107 h0.8
  text "+3.3V" at 21.726,29.105 h0.8
  text "GND" at 24.4,29.098 h0.8
  text "D4" at 27.2,29.107 h0.8
  text "D3" at 29.7,29.105 h0.8
  text "D2" at 32.3,29.105 h0.8
  text "TXO" at 34.6,29.098 h0.8
  text "RXI" at 37.2,29.107 h0.8
  text "Reset" at 39.426,29.107 h0.8
  text "A5/SCL" at 41.8,29.098 h0.8
  text "A4/SDA" at 44.8,29.098 h0.8
  text "A3" at 47.6,29.105 h0.8
  text "A2" at 50.2,29.105 h0.8
  text "A1" at 52.7,29.105 h0.8
  text "D5" at 19.1,0.409 h0.8
  text "D6" at 21.9,0.409 h0.8
  text "D7" at 24.6,0.4 h0.8
  text "D8" at 27.1,0.409 h0.8
  text "D9" at 29.5,0.409 h0.8
  text "D10" at 32.1,0.409 h0.8
  text "MOSI" at 34.4,0.409 h0.8
  text "MISO" at 36.8,0.409 h0.8
  text "SCK" at 39.5,0.409 h0.8
  text "+3.3V" at 41.7,0.409 h0.8
  text "GND" at 44.5,0.409 h0.8
  text "A6" at 47.4,0.409 h0.8
  text "A7" at 50,0.4 h0.8
  text "A0" at 52.6,0.409 h0.8

## Text inside footprints (layer, text, board x,y; h text height)
J2: Bottom Overlay "1" at 21.15,4.65 h1 r90
J3: Bottom Overlay "1" at 20.35,25.65 h1 r90
J4: Top Overlay "1" at 59.773,9.303 h1 r180